# Altium PCB QSTL_MicroDSUB_Socket_FFC.PcbDoc
Units mm, origin at the board's own origin, x right, y up, seen from the top; angles counter-clockwise.
Board outline 19 x 32 mm, 4 copper layers (Top Layer, Layer 1, Layer 2, Bottom Layer), stack 0.603 mm thick; 4 components, 27 nets, 84 pads, 60 vias.
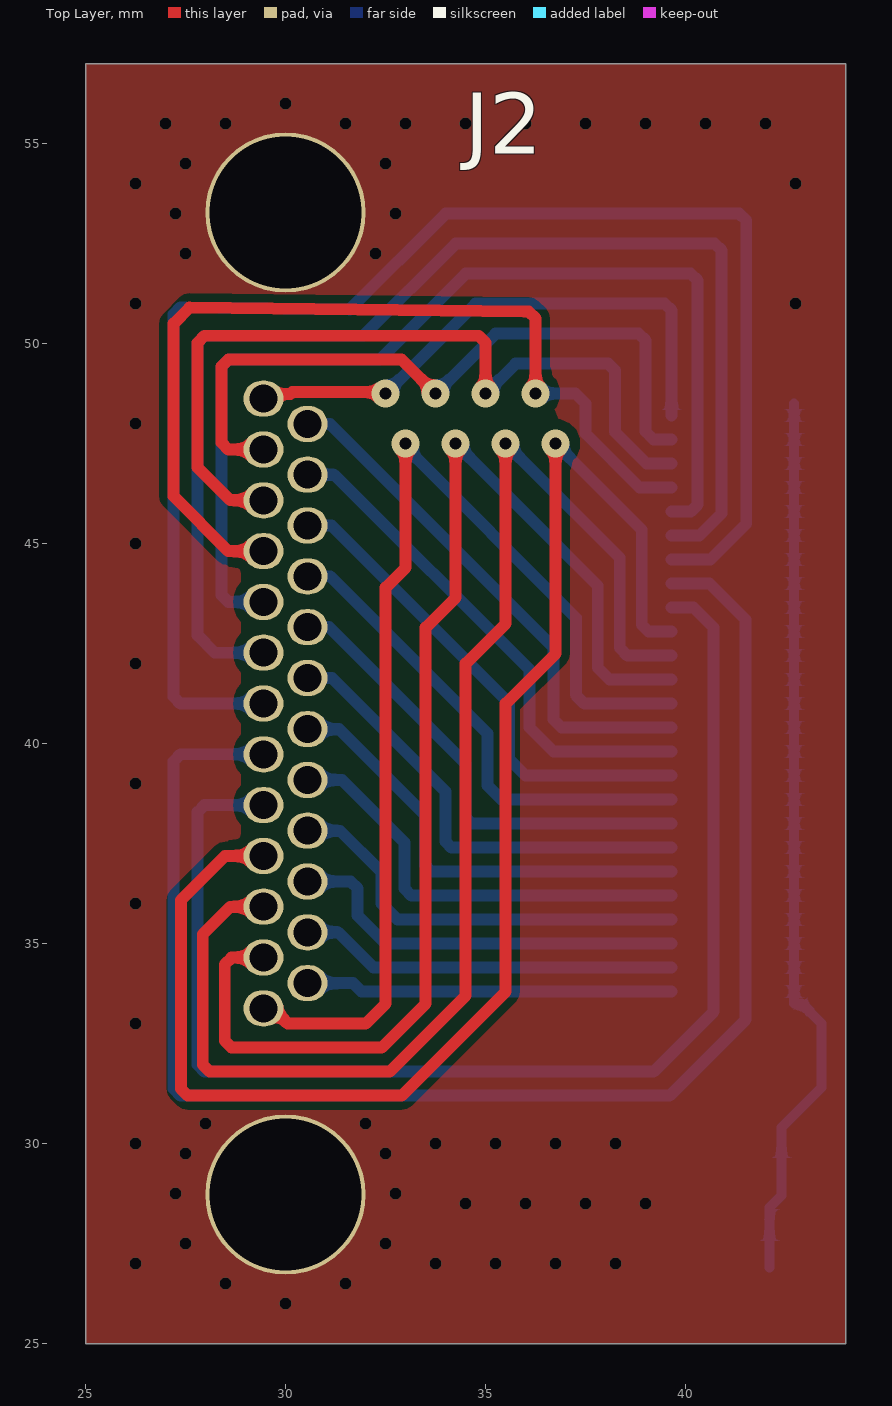
[diagram p0: Top Layer view]
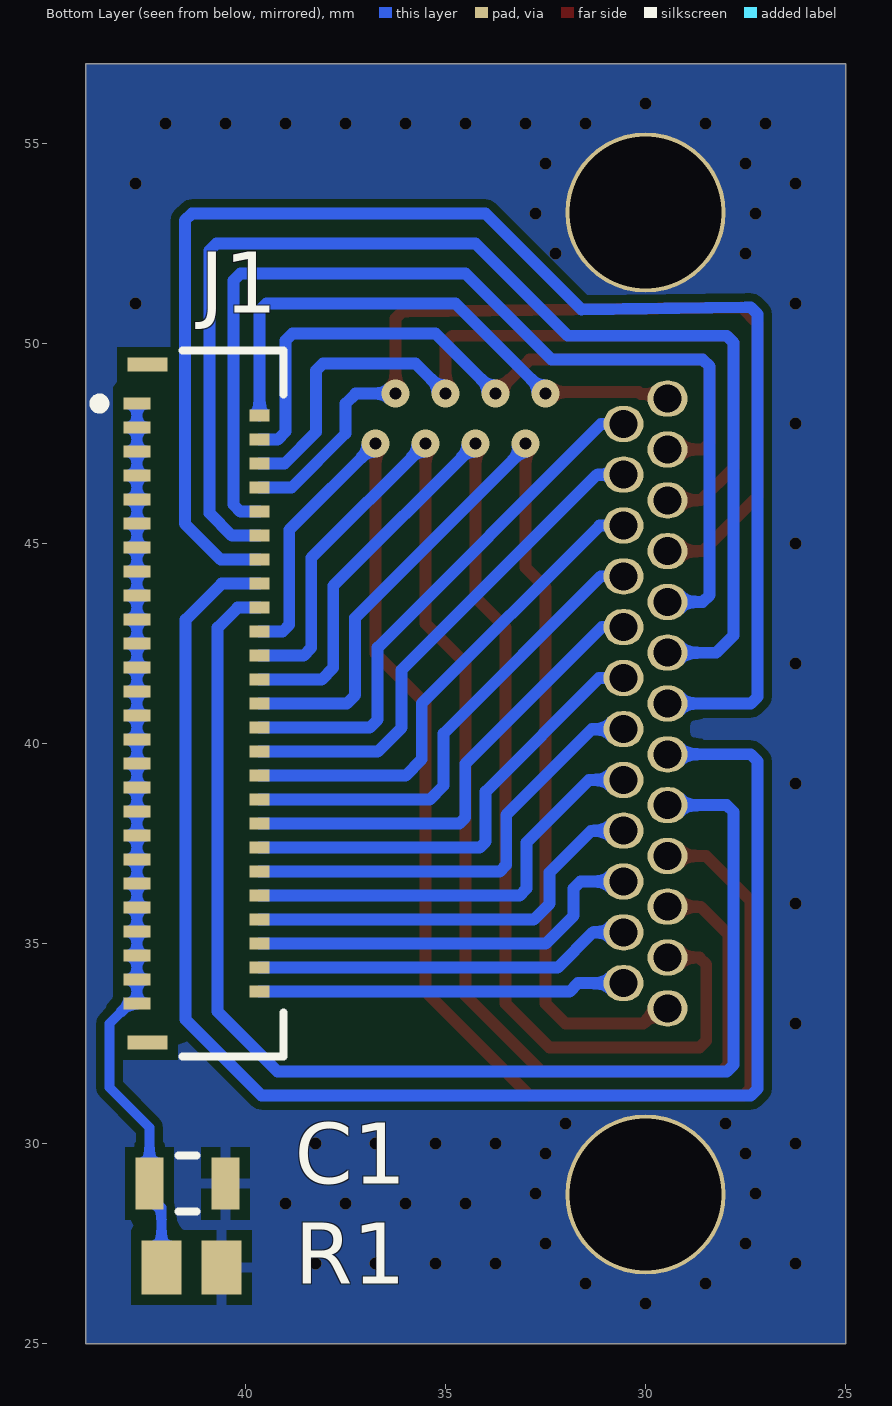
[diagram p1: Bottom Layer view, seen from below]
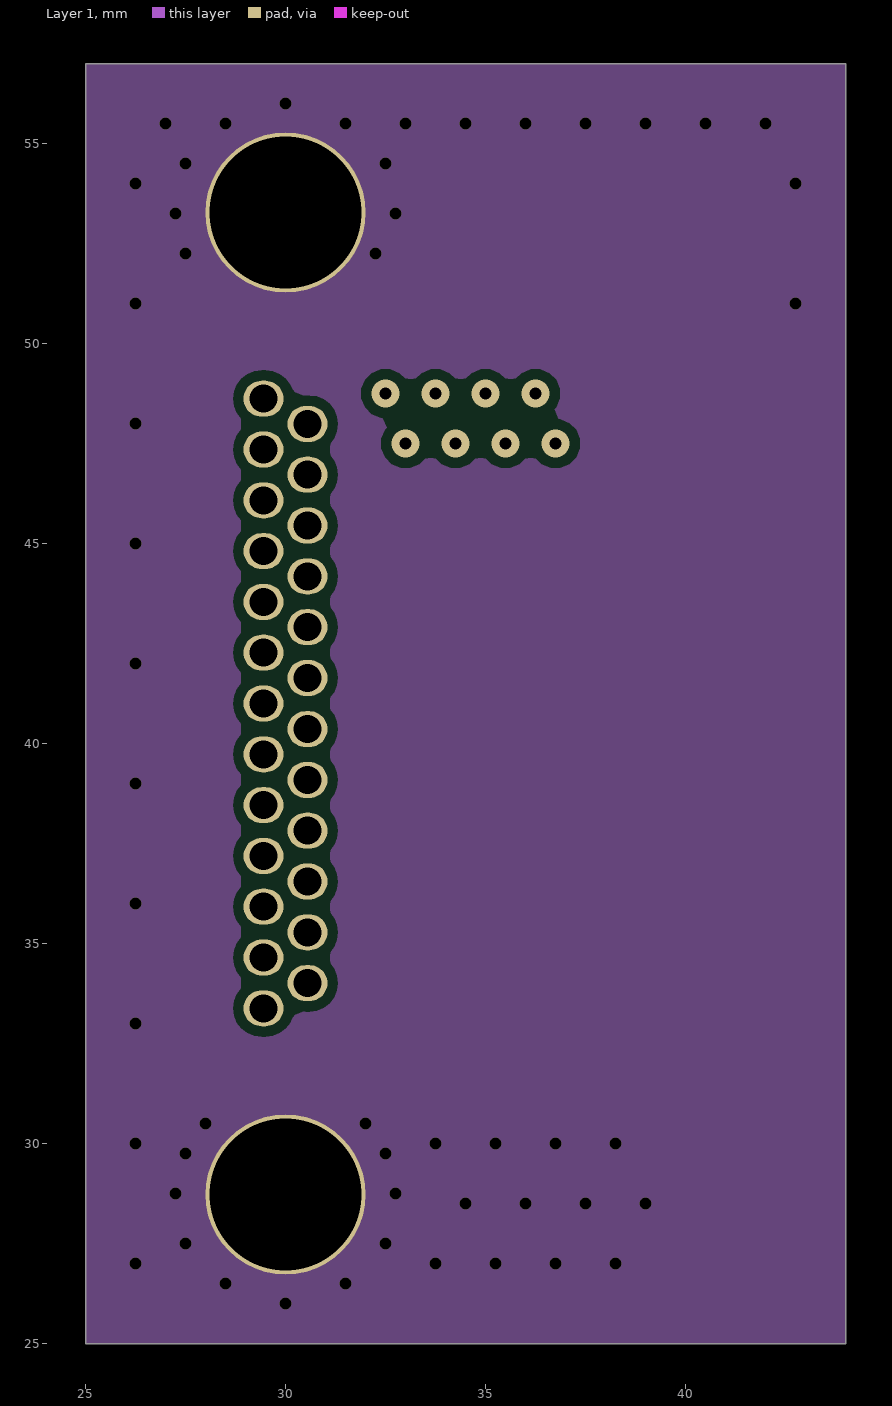
[diagram p2: Layer 1]
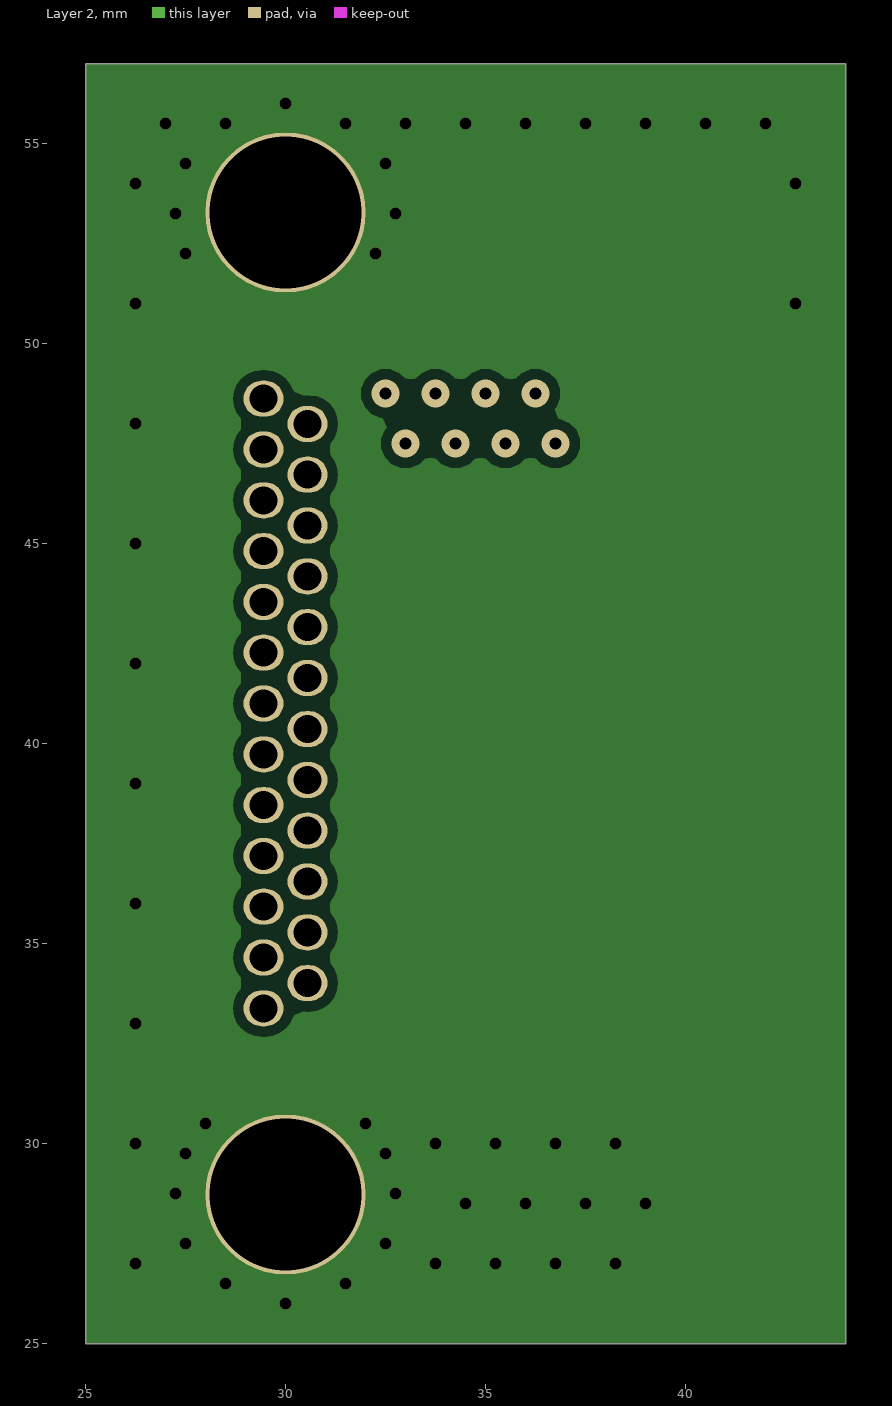
[diagram p3: Layer 2]

## Layer stack, top to bottom
Top Solder: solder mask 0.0102, Solder Resist, Dk 3.5
Top Layer: signal copper 0.0356
Dielectric 2: prepreg 0.0711, PP-006, Dk 4.1
Layer 1: signal copper 0.035
Dielectric 1: dielectric 0.32, FR-4, Dk 4.8
Layer 2: signal copper 0.035
Dielectric 3: prepreg 0.0711, PP-006, Dk 4.1
Bottom Layer: signal copper 0.0356
Bottom Solder: solder mask 0.0102, Solder Resist, Dk 3.5

## Board outline
25,25 25,57 44,57 44,25

## Design rules (kind name [scope] priority, off if disabled: settings)
Clearance [All] p1: gap=0.254 ignorepadtopadclearanceinfootprint=FALSE except(0.2: Arc-Arc Arc-Track Arc-SMDPad Arc-THPad Arc-Via Arc-Fill Arc-Poly Arc-Region Arc-Text Arc-Hole Track-Track Track-SMDPad Track-THPad Track-Via Track-Fill Track-Poly Track-Region Track-Text Track-Hole)
PolygonConnect [All] p1: connectstyle=Relief reliefconductorwidth=0.254 reliefentries=4 polygonreliefangle="90 Angle" airgapwidth=0.254
RoutingVias [All] p1: holewidth=0.3 width=0.7 viastyle="Through Hole" minholewidth=0.3 minwidth=0.3 maxholewidth=0.711 maxwidth=1.27
SolderMaskExpansion [All] p1: expansion=0.102 istentingtop=FALSE
SupplyNets "Schematic Supply Nets" [InNet('GND')] p1: voltage=0.000
Width [All] p1: maxlimit=0.3 minlimit=0.254 preferedwidth=0.254 midlayer1_maxwidth=0.254 midlayer2_maxwidth=0.254 minimp=50.000000 maximp=50.000000 favimp=50.000000
30 further rules are at their usual default settings.

## Components (designator, comment, footprint, x,y, rotation, side; value= is the part's Value field where it differs from the comment)
C1 "Murata 0805" FP-GRM21B-0_15-MFG 41.45,29 r180 bottom
J1 "5025985193" FP-5025985193-MFG 41,41 r270 bottom locked
J2 "Micro DSUB Socket" 380-025-213L001 30,41 r90 top locked
R1 "Panasonic 0805" RESC2013X60X40LL20T25 41.35,26.9 r180 bottom

## Footprints (in the part's own frame and the unit in brackets; to place one, negate y for a bottom-side part, rotate by r counter-clockwise, add the part's x,y. Pads: shape width x height; smd on the part's side, far side on the other; paste and mask are expansions set on the pad)
380-025-213L001 [mm]
  oval 0.9x1 hole 0.7: 1(7.62,0.55) 2(6.35,0.55) 3(5.08,0.55) 4(3.81,0.55) 5(2.54,0.55) 6(1.27,0.55) 7(0,0.55) 8(-1.27,0.55) 9(-2.54,0.55) 10(-3.81,0.55) 11(-5.08,0.55) 12(-6.35,0.55) 13(-7.62,0.55) 14(6.99,-0.55) 15(5.72,-0.55) 16(4.45,-0.55) 17(3.18,-0.55) 18(1.91,-0.55) 19(0.64,-0.55) 20(-0.64,-0.55) 21(-1.91,-0.55) 22(-3.18,-0.55) 23(-4.45,-0.55) 24(-5.72,-0.55) 25(-6.99,-0.55)
  round 4 hole 3.8: SH1(12.275,0) SH2(-12.275,0)
  body extent -14.85,-3.65 14.85,3.7, height 8.3
FP-5025985193-MFG [mm]
  rect 0.3x0.67 smd paste+0 mask+0: 1(-7.5,-1.715) 3(-6.9,-1.715) 5(-6.3,-1.715) 7(-5.7,-1.715) 9(-5.1,-1.715) 11(-4.5,-1.715) 13(-3.9,-1.715) 15(-3.3,-1.715) 17(-2.7,-1.715) 19(-2.1,-1.715) 21(-1.5,-1.715) 23(-0.9,-1.715) 25(-0.3,-1.715) 27(0.3,-1.715) 29(0.9,-1.715) 31(1.5,-1.715) 33(2.1,-1.715) 35(2.7,-1.715) 37(3.3,-1.715) 39(3.9,-1.715) 41(4.5,-1.715) 43(5.1,-1.715) 45(5.7,-1.715) 47(6.3,-1.715) 49(6.9,-1.715) 51(7.5,-1.715)
  rect 0.3x0.5 smd paste+0 mask+0: 2(-7.2,1.35) 4(-6.6,1.35) 6(-6,1.35) 8(-5.4,1.35) 10(-4.8,1.35) 12(-4.2,1.35) 14(-3.6,1.35) 16(-3,1.35) 18(-2.4,1.35) 20(-1.8,1.35) 22(-1.2,1.35) 24(-0.6,1.35) 26(0,1.35) 28(0.6,1.35) 30(1.2,1.35) 32(1.8,1.35) 34(2.4,1.35) 36(3,1.35) 38(3.6,1.35) 40(4.2,1.35) 42(4.8,1.35) 44(5.4,1.35) 46(6,1.35) 48(6.6,1.35) 50(7.2,1.35)
  rect 0.35x1 smd paste+0 mask+0: 52(-8.475,-1.45) 53(8.475,-1.45)
  silkscreen extent -8.83,-2.78 8.82,1.95
FP-GRM21B-0_15-MFG [mm]
  rect 0.7x1.3 smd paste+0 mask+0: 1(-0.95,0) 2(0.95,0)
  silkscreen extent -0.23,-0.7 0.23,0.7, body extent -1,-0.63 1,0.63, height 1.4
RESC2013X60X40LL20T25 [mm] "Chip Resistor, 2-Leads, Body 2.00x1.25mm, IPC High Density"
  rect 1x1.35 smd: 1(-0.75,0) 2(0.75,0)
  body extent -1.1,-0.72 1.1,0.72, height 0.6

## Part data
C1: library part CMP-2000-07555-2, "Chip Multilayer Ceramic Capacitors for General Purpose, 0805, 10uF, X7R, 15%, 10%, 10V", Capacitance=10uF, Case Code (Imperial)=0805, Case Code (Metric)=2012, Dielectric=X7R, Max Operating Temperature=125°C, Min Operating Temperature=-55°C, Package Quantity=3000, Tolerance=10%, Voltage Rating=10V, Case/Package=0805, Depth=1.25mm, Height=1.25mm, Length=2mm, Mount="Surface Mount", Packaging="Tape and Reel", REACH SVHC="No SVHC", Termination=SMD/SMT, Thickness=0.055inch, Voltage Rating (DC)=10V, Weight=0.000335oz, Width=1.25mm
J1: library part CMP-1241-00093-2, "CONN FPC 51POS 0.30MM R/A", Ambient Temperature Range High=+105°C, Ambient Temperature Range Low=-40°C, Current Rating=0.3A, Manufacturer=Molex, Package=0, Temperature="-40°C to +105°C", Voltage Rating=50V, Automotive=No, Category=Conn, Ciiva Ids=8412513, ComponentLink2Description=Datasheet, ComponentLink2URL=https://www.molex.com/webdocs/datasheets/pdf/en-us/5025985193_FFC_FPC_CONNECTORS.pdf, Conn Gender=Female, Conn Orientation="Right Angle", Contact Material=Gold,Nickel, Device Class L1=Connectors, Device Class L2="FFC / FPC", Device Class L3=unset, Digikey Description="CONN FPC 51POS 0.30MM R/A", Footprint Url=https://www.molex.com/pdm_docs/sd/5025985193_sd.pdf, Height=1.83mm, Import Ts=1521860080, Is Female=yes, Lead Free=Yes, Manufacturer Part Number=5025985193, Mouser Description="FFC & FPC Connectors 0.3 FPC BackFlip Hsg RA SMT 51Ckt", Number of Contacts=51, Octopart=https://octopart.com/502598-5193-molex-33127991, Pitch=0.6mm, Release Date=1411372322, RoHS=TRUE, Temperature Range High=+105°C, Temperature Range Low=-40°C
J2: library part 380-025-213L001, "https://www.digikey.ca/en/products/detail/norcomp-inc/380-025-213L001/2798600?s=N4IgTCBcDaIMwA4AMBaJYCsKwEY4BkkkcQBdAXyA"
R1: library part CMP-2001-00613-1, Manufacturer=Panasonic, Part Number=ERA6AEB222V

## Via types
v1: diameter 0.3, hole 0.3, Top Layer to Bottom Layer, tented both sides, 52 vias
v2: diameter 0.7, hole 0.3, Top Layer to Bottom Layer, tented both sides, 8 vias

## Nets (pads, with @x,y where several pads share a name; then routed paths per layer and width w, separated by ;. In a path a pad name is that pad's centre, name@x,y a point inside that pad or via, vN(x,y) a via of type N, cw(c..) or ccw(c..) an arc to the next point about the centre after c; other vN are vias at no path point)
1: J1.2 J2.1 | length 13.9
  Top Layer w0.294: J2.1 29.566,48.736 30.119,48.736 30.17,48.787 32.463,48.787 v2(32.5,48.75)
  Bottom Layer w0.294: v2(32.5,48.75) 34.75,51 39.478,51 39.65,50.828 J1.2
2: J1.4 J2.2 | length 17.8
  Top Layer w0.294: J2.2 28.572,47.35 28.4,47.522 28.4,49.428 28.572,49.6 32.9,49.6 v2(33.75,48.75)
  Bottom Layer w0.294: v2(33.75,48.75) 35.25,50.25 38.828,50.25 39,50.078 39,48.517 38.999,48.516 38.999,47.801 39.2,47.6 J1.4
3: J1.6 J2.3 | length 20.6
  Top Layer w0.294: J2.3 28.62,46.08 27.8,46.9 27.8,50.02 27.972,50.192 34.828,50.192 35,50.02 v2(35,48.75)
  Bottom Layer w0.294: v2(35,48.75) 35.75,49.5 38.064,49.5 38.236,49.328 38.236,47.789 39.025,47 J1.6
4: J1.8 J2.4 | length 23.4
  Top Layer w0.294: J2.4 28.569,44.81 27.2,46.179 27.2,50.5 27.6,50.9 27.6,50.902 35.96,50.803 36.078,50.799 36.25,50.627 v2(36.25,48.75)
  Bottom Layer w0.294: v2@36.5,48.75 v2(36.25,48.75) 37.25,48.75 37.5,48.5 37.5,47.75 38.85,46.4 J1.8
5: J1.10 J2.5 | length 26.1
  Bottom Layer w0.294: J2.5 28.572,43.54 28.4,43.712 28.4,49.428 28.572,49.6 32.35,49.6 34.5,51.75 40.128,51.75 40.3,51.578 40.3,48.517 40.301,48.516 40.301,45.973 40.128,45.8 J1.10
6: J1.12 J2.6 | length 31.4
  Bottom Layer w0.294: J2.6 28.233,42.27 27.8,42.703 27.8,50.02 27.972,50.192 31.942,50.192 34.25,52.5 40.728,52.5 40.9,52.328 40.9,45.759 40.341,45.2 J1.12
7: J1.14 J2.7 | length 37.2
  Bottom Layer w0.294: J2.7 27.372,41 27.2,41.172 27.2,50.612 27.2,50.734 27.372,50.906 27.498,50.906 31.603,50.853 34,53.25 41.344,53.25 41.516,53.078 41.516,45.498 40.618,44.6 J1.14
8: J1.16 J2.8 | length 37.9
  Bottom Layer w0.294: J2.8 27.372,39.73 27.2,39.558 27.2,31.372 27.372,31.2 39.6,31.2 41.5,33.1 41.5,43.1 40.6,44 J1.16
9: J1.18 J2.9 | length 32.5
  Bottom Layer w0.294: J2.9 27.972,38.46 27.8,38.288 27.8,31.972 27.972,31.8 39.2,31.8 40.7,33.3 40.7,42.9 40.2,43.4 J1.18
10: J1.20 J2.10 | length 36.9
  Top Layer w0.294: J2.10 28.49,37.19 27.384,36.084 27.384,31.372 27.556,31.2 32.9,31.2 35.5,33.8 35.5,41 36.75,42.25 v2(36.75,47.5)
  Bottom Layer w0.294: v2@36.763,47.487 38.904,45.346 38.904,42.972 39.076,42.8 J1.20
11: J1.22 J2.11 | length 34.4
  Top Layer w0.294: J2.11 28.62,35.92 27.932,35.232 27.932,31.972 28.104,31.8 32.6,31.8 34.5,33.7 34.5,42 35.5,43 v2(35.5,47.5)
  Bottom Layer w0.294: v2(35.5,47.5) 38.356,44.644 38.356,42.393 38.549,42.2 J1.22
12: J1.24 J2.12 | length 31.8
  Top Layer w0.294: J2.12 28.652,34.65 28.48,34.478 28.48,32.572 28.652,32.4 32.4,32.4 33.5,33.5 33.5,42.9 34.25,43.65 v2(34.25,47.5)
  Bottom Layer w0.294: v2(34.25,47.5) 37.808,43.942 37.808,41.892 38.1,41.6 J1.24
13: J1.26 J2.13 | length 28.2
  Top Layer w0.294: J2.13 29.675,33.38 30.055,33 32,33 32.5,33.5 32.5,43.9 33,44.4 v2(33,47.5)
  Bottom Layer w0.294: v2(33,47.5) 33,47.402 37.26,43.141 37.26,41.212 37.472,41 J1.26
14: J1.28 J2.14 | length 13.3
  Bottom Layer w0.294: J2.14 31.11,47.99 36.7,42.4 36.7,40.6 36.9,40.4 J1.28
15: J1.30 J2.15 | length 12.8
  Bottom Layer w0.294: J2.15 31.22,46.72 36.1,41.84 36.1,40.4 36.7,39.8 J1.30
16: J1.32 J2.16 | length 12.5
  Bottom Layer w0.294: J2.16 31.15,45.45 35.592,41.008 35.592,39.608 36,39.2 J1.32
17: J1.34 J2.17 | length 12.2
  Bottom Layer w0.294: J2.17 31.12,44.18 35.05,40.25 35.05,38.95 35.4,38.6 J1.34
18: J1.36 J2.18 | length 11.9
  Bottom Layer w0.294: J2.18 31.09,42.91 34.508,39.492 34.508,38.149 34.657,38 J1.36
19: J1.38 J2.19 | length 11.6
  Bottom Layer w0.294: J2.19 31.16,41.64 34,38.8 34,37.549 34.149,37.4 J1.38
20: J1.40 J2.20 | length 11.3
  Bottom Layer w0.294: J2.20 31.34,40.36 33.484,38.216 33.484,36.965 33.649,36.8 J1.40
21: J1.42 J2.21 | length 11
  Bottom Layer w0.294: J2.21 31.41,39.09 32.976,37.524 32.976,36.373 33.149,36.2 J1.42
22: J1.44 J2.22 | length 10.5
  Bottom Layer w0.294: J2.22 31.362,37.82 32.4,36.782 32.4,36 32.8,35.6 J1.44
23: J1.46 J2.23 | length 10.1
  Bottom Layer w0.294: J2.23 31.628,36.55 31.8,36.378 31.8,35.7 32.5,35 J1.46
24: J1.48 J2.24 | length 9.5
  Bottom Layer w0.294: J2.24 31.32,35.28 32.2,34.4 J1.48
25: J1.50 J2.25 | length 9.2
  Bottom Layer w0.294: J2.25 31.69,34.01 31.9,33.8 J1.50
GND: C1.2 J2.SH1 J2.SH2 R1.2
  other v1: 30,26 28.5,26.5 31.5,26.5 26.25,27 33.75,27 35.25,27 36.75,27 38.25,27 27.5,27.5 32.5,27.5 34.5,28.5 36,28.5 37.5,28.5 39,28.5 27.25,28.75 32.75,28.75 27.5,29.75 32.5,29.75 26.25,30 33.75,30 35.25,30 36.75,30 38.25,30 28,30.5 32,30.5 26.25,33 26.25,36 26.25,39 26.25,42 26.25,45 26.25,48 26.25,51 42.75,51 27.5,52.25 32.25,52.25 27.25,53.25 32.75,53.25 26.25,54 42.75,54 27.5,54.5 32.5,54.5 27,55.5 28.5,55.5 31.5,55.5 33,55.5 34.5,55.5 36,55.5 37.5,55.5 39,55.5 40.5,55.5 42,55.5 30,56
NetC1_1: C1.1 J1.1 J1.3 J1.5 J1.7 J1.9 J1.11 J1.13 J1.15 J1.17 J1.19 J1.21 J1.23 J1.25 J1.27 J1.29 J1.31 J1.33 J1.35 J1.37 J1.39 J1.41 J1.43 J1.45 J1.47 J1.49 J1.51 R1.1 | length 22.5
  Bottom Layer w0.254: R1.1 42.1,28.4 42.4,28.7 C1.1 42.4,30.4 43.4,31.4 43.4,33 42.9,33.5 J1.51 J1.49 J1.47 J1.45 J1.43 J1.41 J1.39 J1.37 J1.35 J1.33 J1.31 J1.29 J1.27 J1.25 J1.23 J1.21 J1.19 J1.17 J1.15 J1.13 J1.11 J1.9 J1.7 J1.5 J1.3 J1.1
pads on no net: J1.52 J1.53

## Polygon pours and split planes (outlines as drawn)
no net on Bottom Solder "NONET_L03_P-001" (solid): 25,51.25 26.75,51.25 26.75,30.75 25,30.75
no net on Bottom Solder "NONET_L03_P-001" (solid): 25,51.25 31.5,51.25 34.75,54.5 44,54.5 44,57 25,57
no net on Bottom Solder "NONET_L03_P-001" (solid): 25,30.75 38.25,30.75 38.25,25 25,25
GND on Layer 1 "NONET_L03_P-001" (solid, remove dead copper, pour order 1): 25,25 44,25 44,57 25,57
GND on Layer 2 "NONET_L03_P-001" (solid, remove dead copper, pour order 2): 25,25 44,25 44,57 25,57
GND on Bottom Layer "NONET_L03_P-001" (solid, remove dead copper, pour order 3): 25,25 44,25 44,57 25,57
GND on Top Layer "NONET_L03_P-001" (solid, remove dead copper, pour order 0): 25,25 44,25 44,57 25,57
no net on Top Solder "NONET_L03_P-001" (solid): 37.25,51.25 37.25,30.75 44,30.75 44,51.25
no net on Top Solder "NONET_L03_P-001" (solid): 25,51.25 26.75,51.25 26.75,30.75 25,30.75
no net on Top Solder "NONET_L03_P-001" (solid): 44,30.75 44,25 25,25 25,30.75
no net on Top Solder "NONET_L03_P-001" (solid): 25,57 44,57 44,51.25 25,51.25

## Silkscreen, mask and mechanical layers (free items; w line width, h text height)
Mechanical 1:
  lines w0.3: 25,25 25,57 44,57 44,56 44,25 25,25